# Altium PCB ums.PcbDoc (part 1 of 2)
Units mm, origin at the board's own origin, x right, y up, seen from the top; angles counter-clockwise.
Board outline 30 x 30 mm, 6 copper layers (Top, POWER, INNER_TOP, INNER_BOTTOM, GROUND, Bottom), stack 1.545 mm thick; 182 components, 122 nets, 559 pads, 122 vias.
Unrouted connection lines stored in the file: 144.
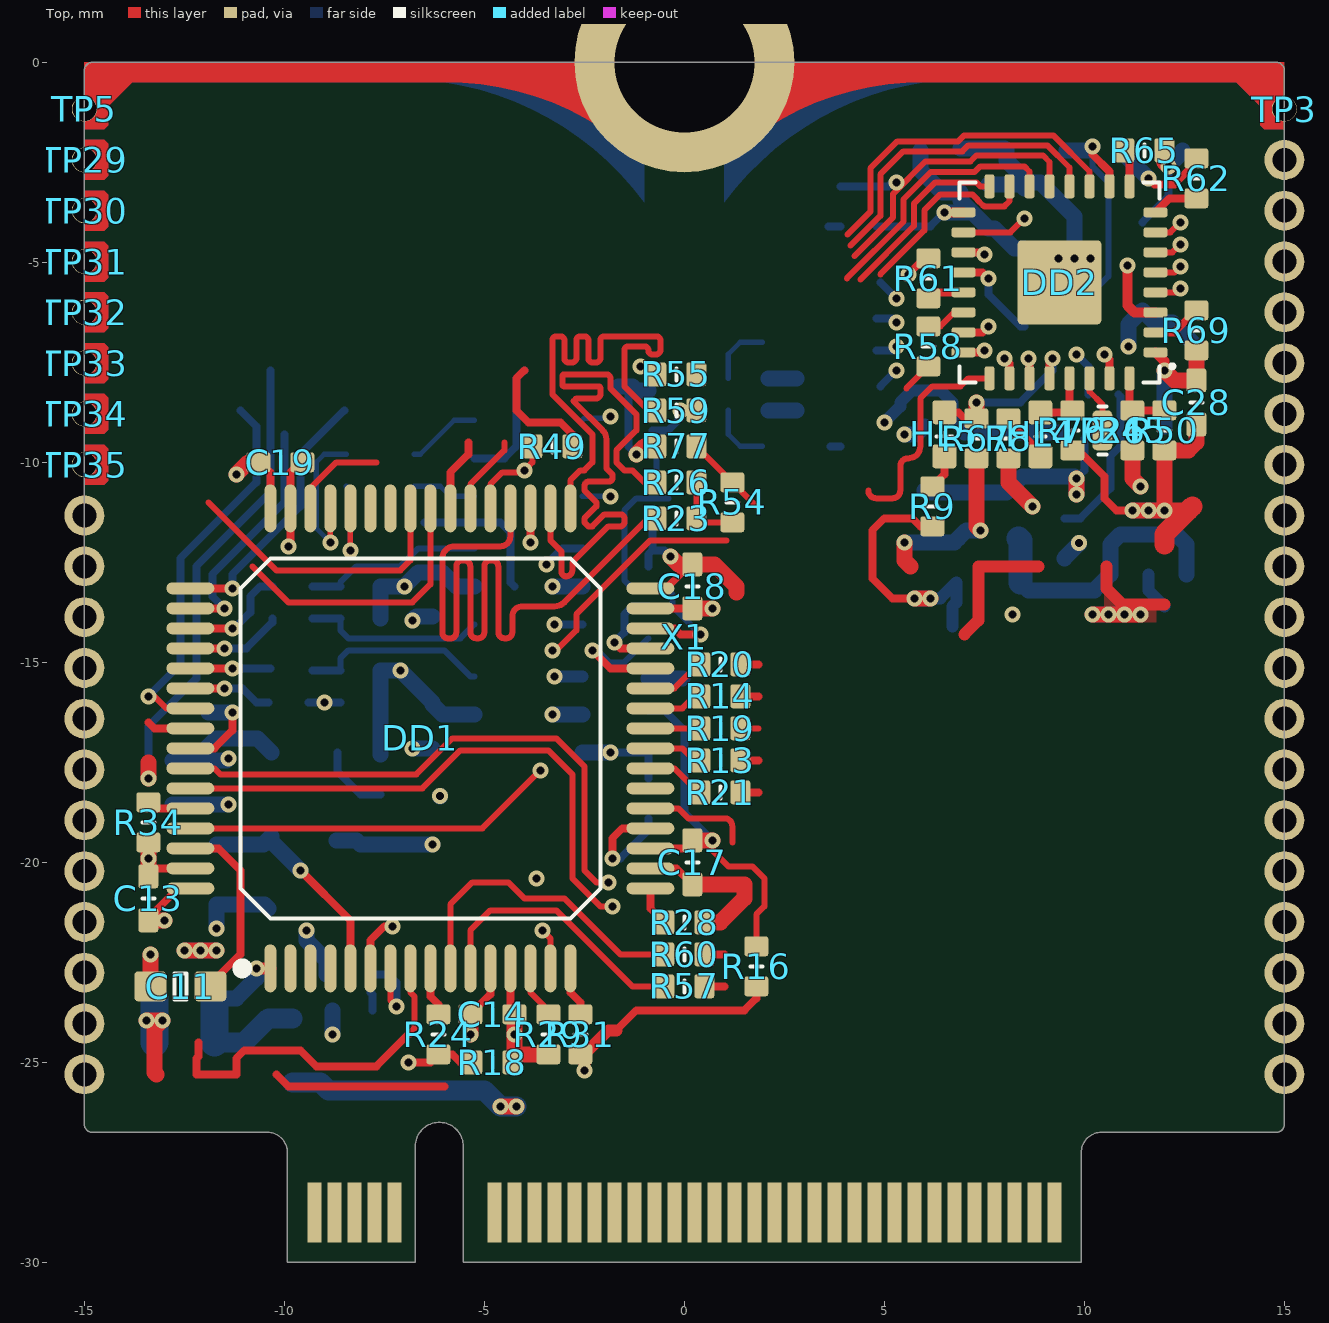
[diagram p0: Top view]
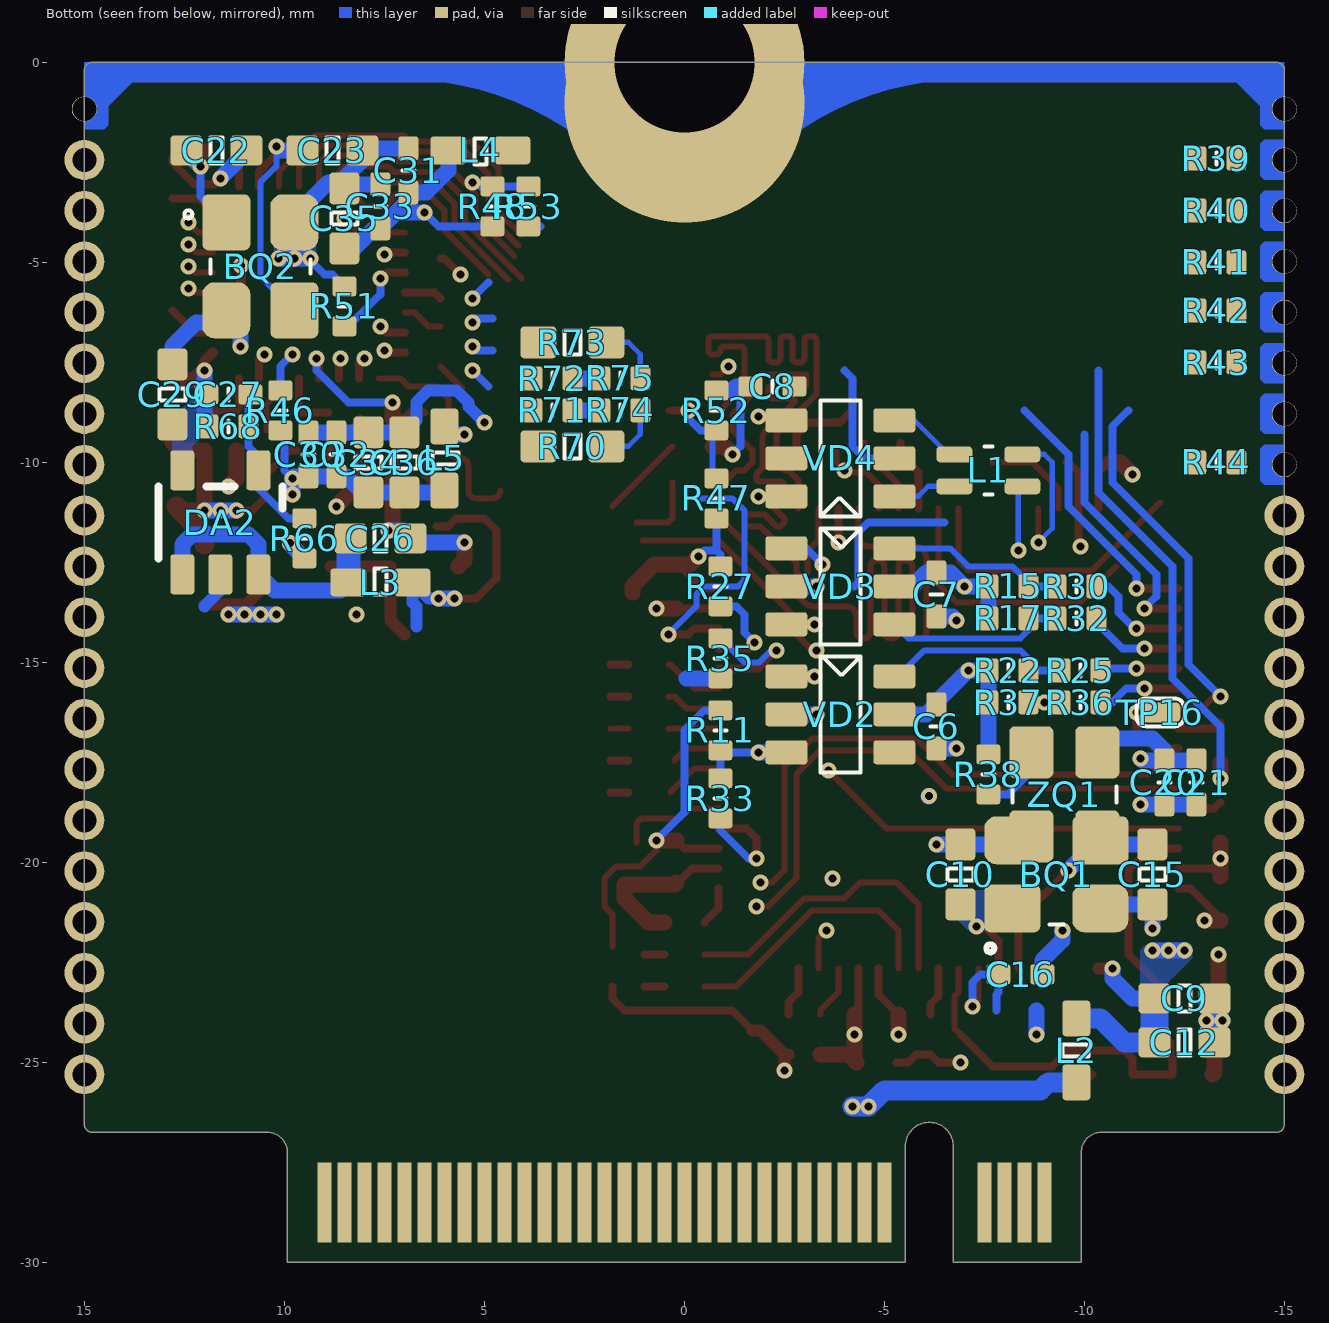
[diagram p1: Bottom view, seen from below]
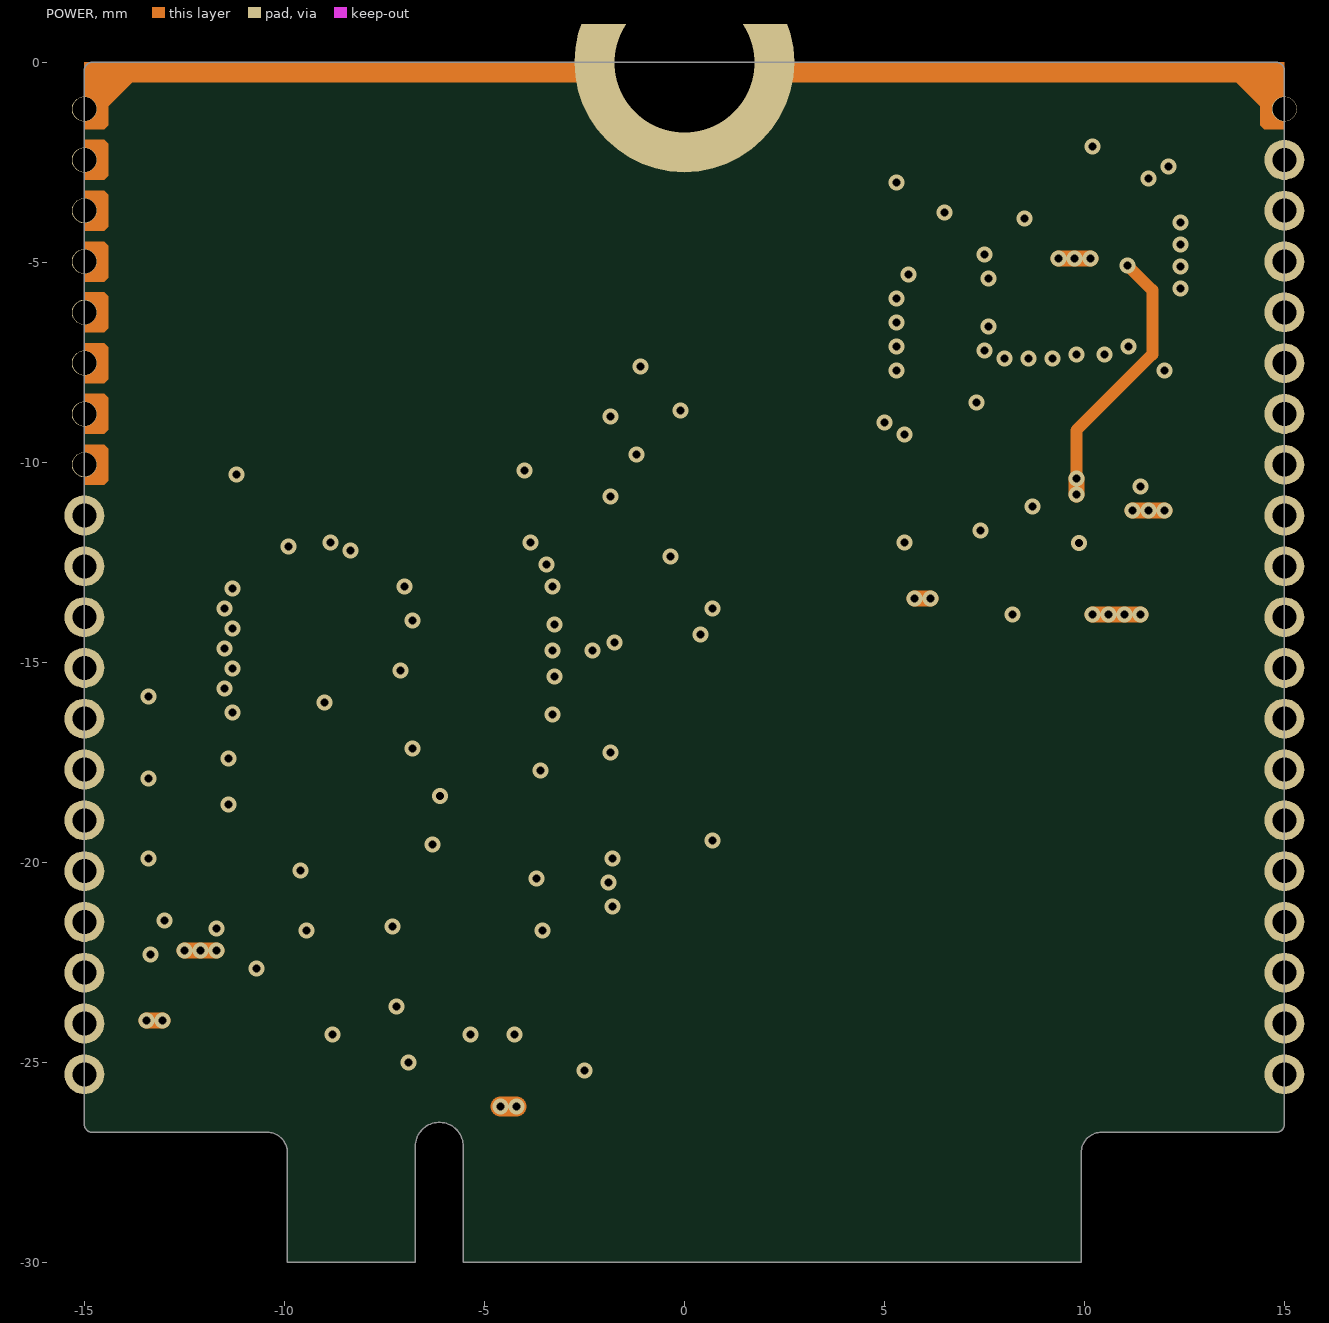
[diagram p2: POWER]
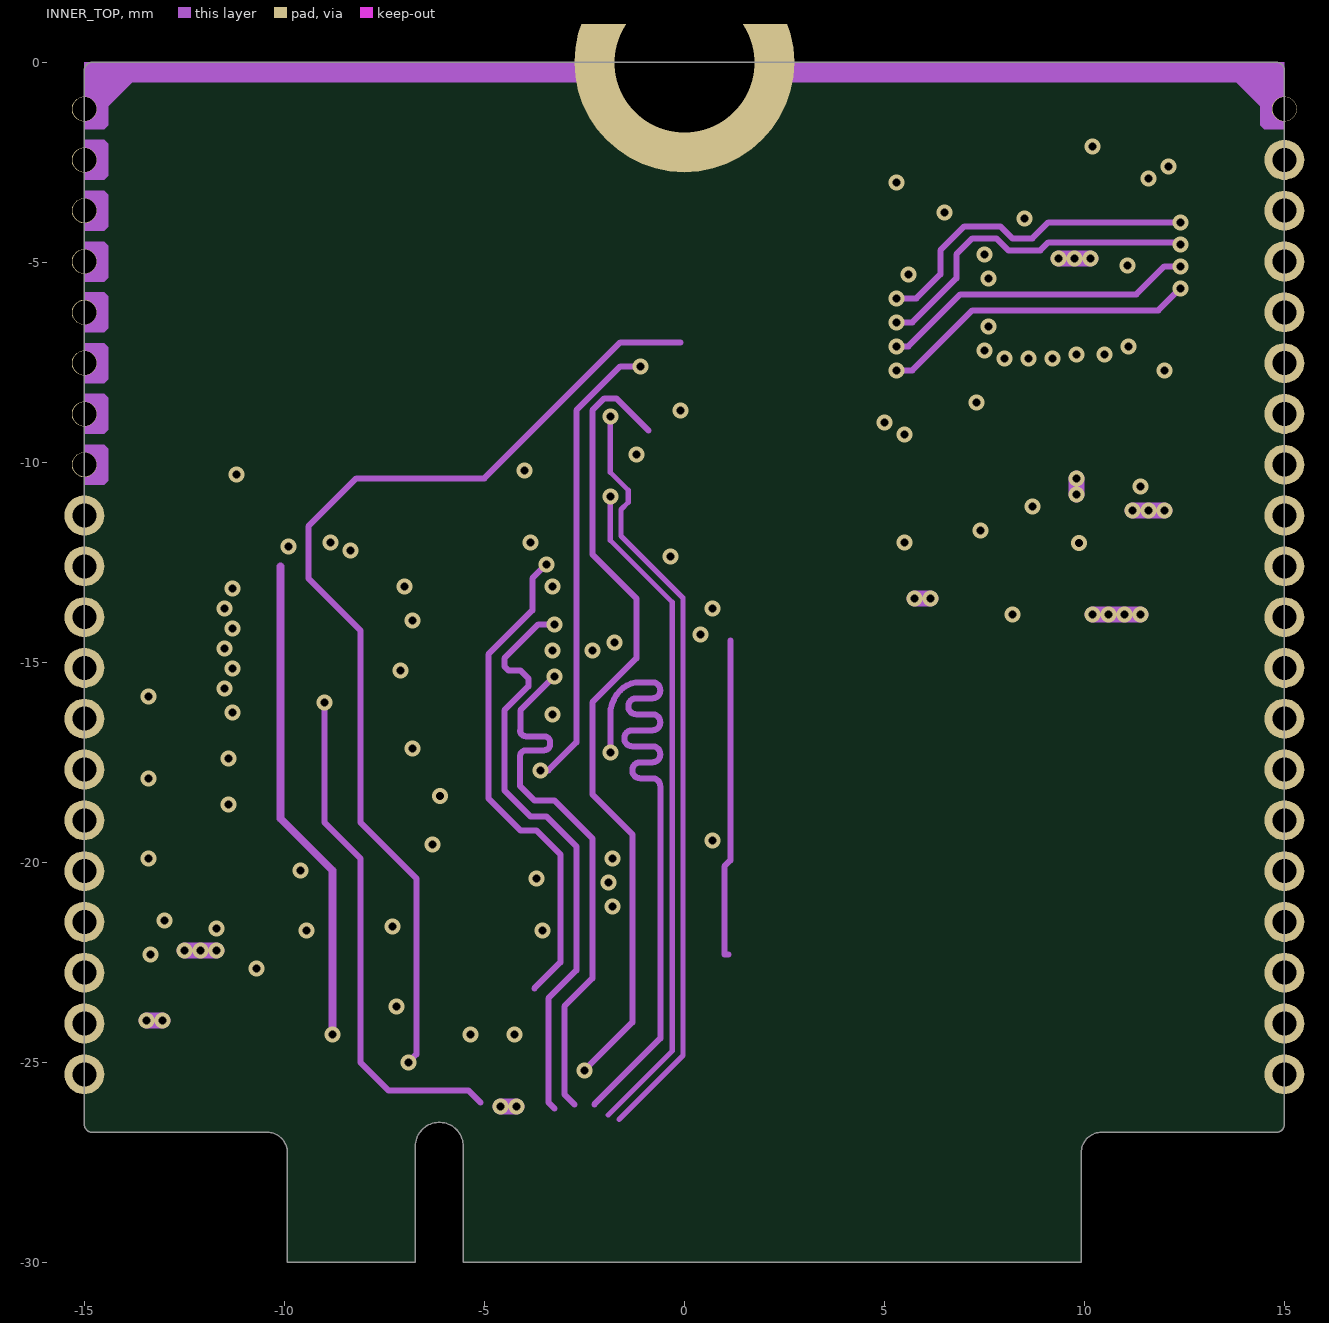
[diagram p3: INNER_TOP]
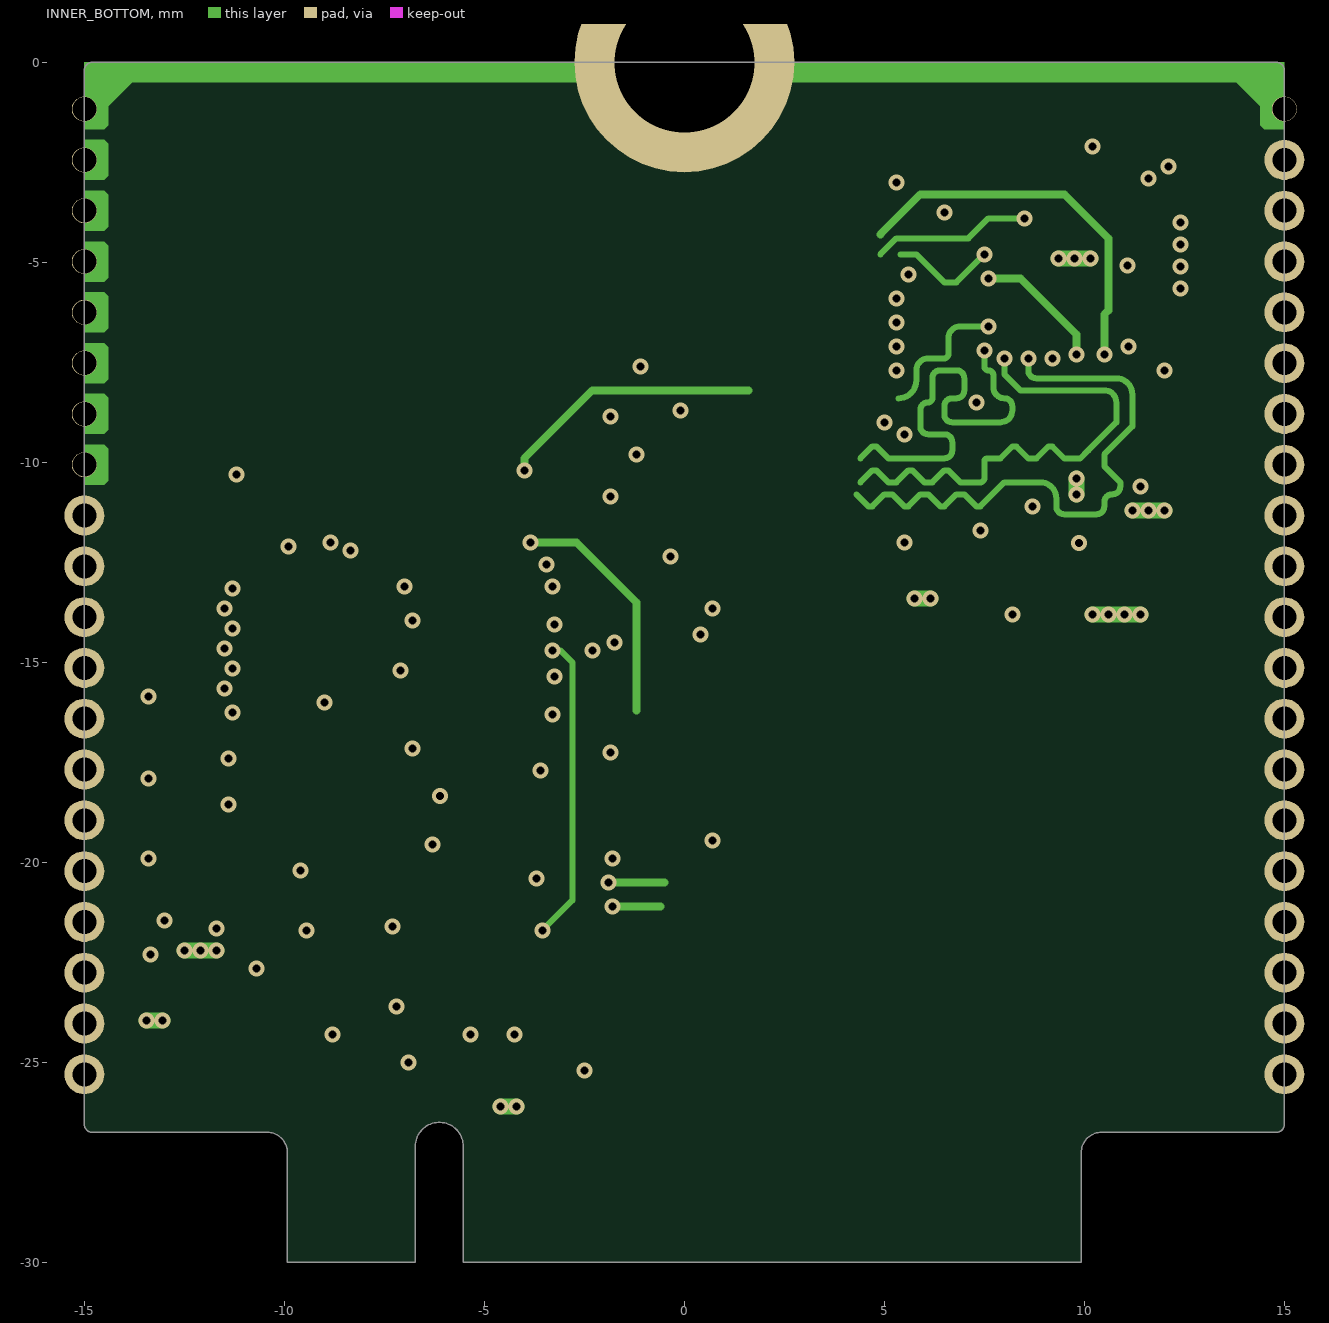
[diagram p4: INNER_BOTTOM]
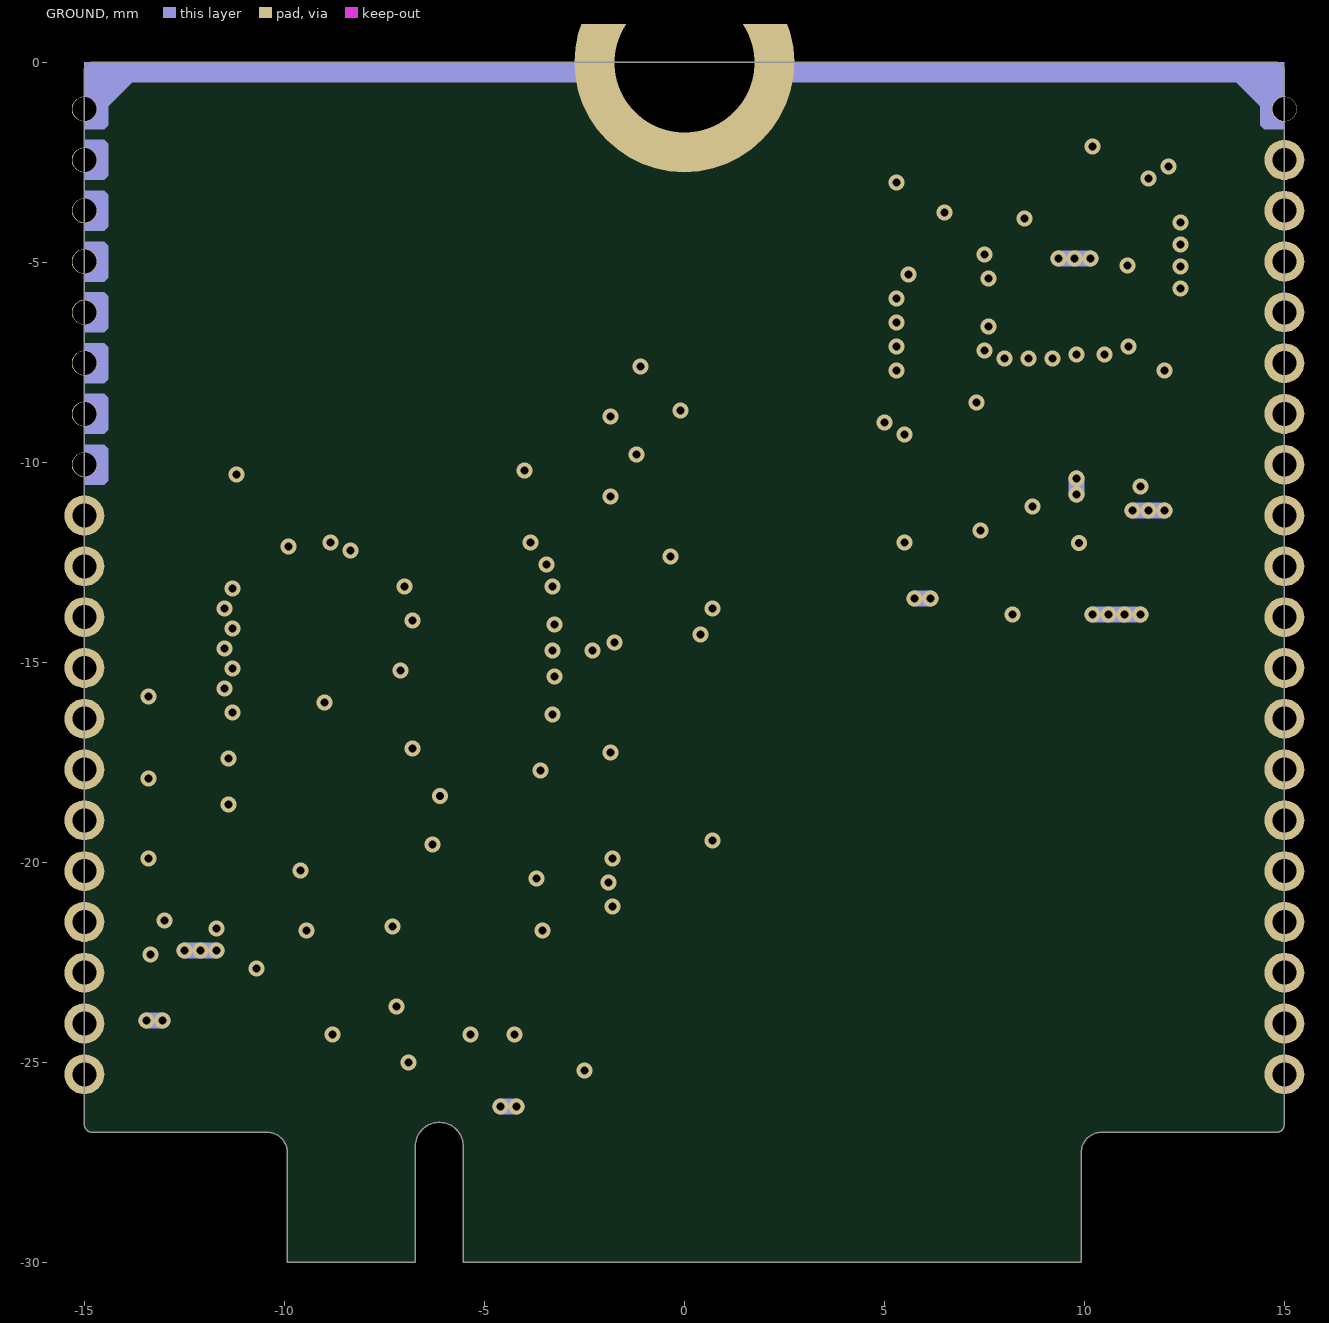
[diagram p5: GROUND]

## Layer stack, top to bottom
Top Solder Mask: solder mask 0.025, Solder Resist, Dk 3.5
Top: signal copper 0.045
PREPREG_TOP: prepreg 0.125, 2116, Dk 5.07
POWER: signal copper 0.015
CORE_TOP: core 0.51, FR-4(TG 170), Dk 4.7
INNER_TOP: signal copper 0.015
PREPREG_INNER: prepreg 0.125, 2116, Dk 5.07
INNER_BOTTOM: signal copper 0.015
CORE_BOTTOM: core 0.51, FR-4(TG 170), Dk 4.7
GROUND: signal copper 0.015
PREPREG_BOTTOM: prepreg 0.125, 2116, Dk 5.07
Bottom: signal copper 0.045
Bottom Solder Mask: solder mask 0.025, Solder Resist, Dk 3.5

## Board outline
-9.925,-30 -9.925,-27.25 ccw(c-10.425,-27.25) -10.425,-26.75 -14.8,-26.75 cw(c-14.8,-26.55) -15,-26.55 -15,-0.2 cw(c-14.8,-0.2) -14.8,0 14.8,0 cw(c14.8,-0.2) 15,-0.2 15,-26.55 cw(c14.8,-26.55) 14.8,-26.75 10.425,-26.75 ccw(c10.425,-27.25) 9.925,-27.25 9.925,-30 -5.525,-30 -5.525,-27.1 ccw(c-6.125,-27.1) -6.725,-27.1 -6.725,-30

## Design rules (kind name [scope] priority, off if disabled: settings)
BoardOutlineClearance BoardOutlineClearanceSilk [OnLayer('Top Overlay') or OnLayer('Bottom Overlay')] p1: gap=0.01 ignorepadtopadclearanceinfootprint=FALSE
BoardOutlineClearance BoardOutlineClearancePolygon [IsPoly] p2: gap=0.5 ignorepadtopadclearanceinfootprint=FALSE
BoardOutlineClearance [All] p3: gap=0.25 ignorepadtopadclearanceinfootprint=FALSE
Clearance Clearance_BOARD [InNetClass('All Nets') vs OnLayer('Board')] p1: gap=0.3 ignorepadtopadclearanceinfootprint=FALSE
Clearance Clearance_KeepOut [InNetClass('All Nets') vs OnLayer('Keep-Out Layer')] p2: gap=0.3 ignorepadtopadclearanceinfootprint=FALSE
Clearance ClearancePolygonsToHighSpeed [InNetClass('MII_RX') or InNetClass('MII_RX_PHY') or InNetClass('MII_TX') or InNetClass('MII_TX_MCU') or InDifferentialPair('PHY_TX_RX') or InDifferentialPair('D') or InDifferentialPair('SPE_DATA') or InDifferentialPair('USB') vs InPolygon] p3: gap=0.45 ignorepadtopadclearanceinfootprint=FALSE
Clearance ClearancePolygons [All vs InPolygon] p4: gap=0.25 ignorepadtopadclearanceinfootprint=FALSE
Clearance [All] p5: gap=0.1 ignorepadtopadclearanceinfootprint=FALSE except(0: Arc-Hole Track-Hole SMDPad-Hole THPad-Hole Via-Hole Fill-Hole Poly-Hole Region-Hole Text-Hole; 0.15: Arc-Poly Track-Poly SMDPad-Poly THPad-Poly Via-Poly Fill-Poly Poly-Poly; 0.2: Poly-Region Poly-Text)
DiffPairsRouting [All] p1: maxlimit=0.12 minlimit=0.12 mostfreqgap=0.12 toplayer_minwidth=0.13 toplayer_maxwidth=0.13 toplayer_prefwidth=0.13 midlayer1_minwidth=0.13 midlayer1_maxwidth=0.381 midlayer1_prefwidth=0.13 midlayer2_minwidth=0.13 midlayer2_maxwidth=0.381 midlayer2_prefwidth=0.13 midlayer3_minwidth=0.13 midlayer3_maxwidth=0.381 midlayer3_prefwidth=0.13 midlayer4_minwidth=0.13 midlayer4_maxwidth=0.381 midlayer4_prefwidth=0.13 bottomlayer_minwidth=0.13 bottomlayer_maxwidth=0.13 bottomlayer_prefwidth=0.13 maxuncoupledlength=5
FanoutControl Fanout_Default [All] p1: bgadir=Out bgaviamode=Centered fanoutstyle=Auto fanoutdirection=Alternating viagrid=0.025 // Fanout_Default (Default Rule)
HoleSize [All] p1: absolutevalues=TRUE maxlimit=5 minlimit=0.025 maxpercent=80.000 minpercent=20.000
HoleToHoleClearance [All] p1: gap=0.3 allowstackedmicrovias=TRUE
MatchedLengths MatchedLengthsMDI [InNetClass('MDI')] p1: tolerance=3 checknetsindiffpair=FALSE checkdiffpairvsdiffpair=TRUE checkxsignals=TRUE checkothers=TRUE
MatchedLengths MatchedLengthsSPI [InNetClass('SPI')] p2: tolerance=3 checknetsindiffpair=FALSE checkdiffpairvsdiffpair=TRUE checkxsignals=TRUE checkothers=TRUE
MatchedLengths MatchLengths_xSignals_MCU_TX [InxSignalClass('xSignals_MCU_TX_MatchLengthsClass')] p3: tolerance=2 checknetsindiffpair=FALSE checkdiffpairvsdiffpair=TRUE checkxsignals=TRUE checkothers=TRUE
MatchedLengths MatchLengths_xSignals_MCU_RX [InxSignalClass('xSignals_MCU_RX_MatchLengthsClass')] p4: tolerance=2 checknetsindiffpair=FALSE checkdiffpairvsdiffpair=TRUE checkxsignals=TRUE checkothers=TRUE
MinimumSolderMaskSliver [All] p1: minsoldermaskwidth=0.099
PasteMaskExpansion [All] p1: expansion=-0.05
PlaneClearance PlaneClearance_3 [InNetClass('LED')] p1: clearance=0.25
PlaneClearance PlaneClearance_2 [InNetClass('24V')] p2: clearance=0.4
PlaneClearance PlaneClearance_1 [InNet('SHIELD')] p3: clearance=0.6
PlaneClearance [All] p4: clearance=0.2
PlaneConnect PlaneConnect_3 [InNetClass('24V')and ispad] p1: planeconnectstyle=Direct reliefexpansion=0.25 reliefentries=4 reliefconductorwidth=0.4 reliefairgap=0.25
PlaneConnect [IsVia] p2: planeconnectstyle=Direct reliefexpansion=0.508 reliefentries=4 reliefconductorwidth=0.254 reliefairgap=0.254
PlaneConnect PlaneConnect_2 [InNet('SHIELD')and IsPad] p3: planeconnectstyle=Direct reliefexpansion=0.25 reliefentries=4 reliefconductorwidth=0.4 reliefairgap=0.25
PlaneConnect PlaneConnect_1 [IsPad] p4: planeconnectstyle=Direct reliefexpansion=0.25 reliefentries=4 reliefconductorwidth=0.3 reliefairgap=0.25
PolygonConnect [All] p1: thpad.connectstyle=Relief thpad.reliefconductorwidth=0.4 thpad.reliefentries=4 thpad.polygonreliefangle="45 Angle" thpad.airgapwidth=0.25 thpad.conductorbypadedge=TRUE thpad.mindistance=0.4 thpad.enablemindistance=FALSE smdpad.connectstyle=Direct smdpad.reliefconductorwidth=0.3 smdpad.reliefentries=4 smdpad.polygonreliefangle="90 Angle" smdpad.airgapwidth=0.25 via.connectstyle=Direct via.reliefconductorwidth=0.3 via.reliefentries=4 via.polygonreliefangle="90 Angle" via.airgapwidth=0.25
RoutingVias [All] p1: holewidth=0.2 width=0.4 viastyle="Through Hole" minholewidth=0.2 minwidth=0.4 maxholewidth=0.3 maxwidth=0.7
SilkToSilkClearance [All] p1: silktosilkclearance=0.05
SilkToSolderMaskClearance SilkToSolderMaskClearanceNarrow [WithinRoom('Room_Silk_Narrow')] p1: minsilkscreentomaskgap=0.075 clearancetoexposedcopper=FALSE
SilkToSolderMaskClearance [not HasFootprint('TEST_POINT_SMD')] p2: minsilkscreentomaskgap=0.1 clearancetoexposedcopper=FALSE
SolderMaskExpansion [All] p1: expansion=0.05 istentingtop=FALSE
SupplyNets "Schematic Supply Nets_12" [InNet('SPE_VDDA')] p1: voltage=0.000
SupplyNets "Schematic Supply Nets_11" [InNet('PHY_RXD0')] p2: voltage=0.000
SupplyNets "Schematic Supply Nets_10" [InNet('PHY_RXD3')] p3: voltage=0.000
SupplyNets "Schematic Supply Nets_9" [InNet('+3V3')] p4: voltage=0.000
SupplyNets "Schematic Supply Nets_8" [InNet('PHY_ADR1')] p5: voltage=0.000
SupplyNets "Schematic Supply Nets_6" [InNet('GPIO1')] p6: voltage=0.000
SupplyNets "Schematic Supply Nets_5" [InNet('PHY_RXD1')] p7: voltage=0.000
SupplyNets "Schematic Supply Nets_4" [InNet('GND')] p8: voltage=0.000
SupplyNets "Schematic Supply Nets_3" [InNet('SPE_VDDIO')] p9: voltage=0.000
SupplyNets "Schematic Supply Nets_1" [InNet('+3V3MCU')] p10: voltage=0.000
SupplyNets "Schematic Supply Nets" [InNet('LED_G')] p11: voltage=0.000
UnRoutedNet [All] p1: checkbadconnections=TRUE
ViasUnderSMD ViasUnderSMD_GND [InNet('GND')] p1: allowed=TRUE
ViasUnderSMD [All] p2: allowed=TRUE
Width 50Ohm [InNetClass('S50Ohm')] p1: maxlimit=0.16 minlimit=0.14 preferedwidth=0.16 toplayer_minwidth=0.16 midlayer1_maxwidth=0.14 midlayer1_prefwidth=0.14 midlayer2_maxwidth=0.14 midlayer2_prefwidth=0.14 bottomlayer_minwidth=0.16 impedanceprofiledriven=TRUE impedanceprofileid={9A124F16-33E1-49E2-B7BF-F00B3E11272E} impedanceprofilevalue=50.000000 minimp=50.000000 maximp=50.000000 favimp=50.000000
Width [All] p2: maxlimit=100 minlimit=0.1 preferedwidth=0.2
15 further rules are at their usual default settings.

## Classes and differential pairs
net class SPI: CLK MISO MOSI ~CS
net class MDI: MDC MDIO
net class MII_TX_MCU: MCURXD0 MCURXD1 MCURXD2 MCURXD3 MCURXDV
net class MII_RX_PHY: PHY_RXC PHY_RXD0 PHY_RXD1 PHY_RXD2 PHY_RXD3 PHY_RXDV
component class MCU: BQ1 C5 C6 C7 C8 C9 C10 C11 C12 C13 C14 C15 C16 C17 C18 C19 C20 C21 DD1 L1 L2 R10 R11 R12 R13 R14 R15 R16 R17 R18 R19 R20 R21 R22 R23 R24 R25 R26 R27 R28 R29 R30 R31 R32 R33 R34 R35 R36 R37 R38 R39 R40 R41 R42 R43 R44 TP14 TP15 TP16 TP17 TP18 TP19 TP20 TP21 TP22 TP23 TP24 TP29 TP30 TP31 TP32 TP33 TP34 TP35 VD2 VD3 VD4 ZQ1
component class Struct: C1 C2 C3 C4 DA1 HL1 HL2 HL3 HL4 HL5 R1 R2 R3 R4 R5 R6 R7 R8 R9 TP1 TP2 TP3 TP4 TP5 TP6 TP7 TP8 TP9 TP10 TP11 TP12 TP13 VD1 X1
component class RS-485: C37 C38 DD3 L6 L7 R78 R79 R80 R81 VD7
component class T1L: BQ2 C22 C23 C24 C25 C26 C27 C28 C29 C30 C31 C32 C33 C34 C35 C36 DA2 DD2 L3 L4 L5 R45 R46 R47 R48 R49 R50 R51 R52 R53 R54 R55 R56 R57 R58 R59 R60 R61 R62 R63 R64 R65 R66 R67 R68 R69 R70 R71 R72 R73 R74 R75 R76 R77 TP25 TP26 TP27 TP28 VD5 VD6
net class S50Ohm: MCURXD0 MCURXD1 MCURXD2 MCURXD3 MCURXDV PHY_RXC PHY_RXD0 PHY_RXD1 PHY_RXD2 PHY_RXD3 PHY_RXDV PHY_RXN PHY_RXP PHY_TXC PHY_TXN PHY_TXP RXC RXD0 RXD1 RXD2 RXD3 RXDV TXC TXD0 TXD1 TXD2 TXD3 TXEN TXEN_R/VCAP1_H563
net class MII_TX: RXC RXD0 RXD1 RXD2 RXD3 RXDV
net class MII_RX: TXC TXD0 TXD1_H563 TXD1_R TXD2 TXD3 TXEN_H563 TXEN_R/VCAP1_H563
differential pair SPE_DATA_C: +SPE_DATA_C_P -SPE_DATA_C_N
differential pair D: +D_P -D_N
differential pair USB: +USB_P -USB_N
differential pair SPE_DATA: +SPE_DATA_P -SPE_DATA_N

## Components (designator, comment, footprint, x,y, rotation, side; value= is the part's Value field where it differs from the comment)
BQ1 "8 MHz" DSX321G_UNDER12MHZ -9.3,-20.3 r180 bottom
BQ2 "25 MHz" DSX321G_UNDER12MHZ 10.6,-5.1 r270 bottom
C1 "4.7u" C0603 56.4,21.2 r180 top value="4,7 мкФ 10% 16 В X5R"
C2 "100n" C0402 58.9,21.1 r180 top value="100 нФ 10% 50 В X7R"
C3 "100n" C0402 58.3,19 r0 top value="100 нФ 10% 50 В X7R"
C4 "4.7u" C0603 62.5,28.7 r90 top value="4,7 мкФ 10% 16 В X5R"
C5 "4.7u" C0603 -5.8,4 r90 bottom value="4,7 мкФ 10% 16 В X5R"
C6 "100n" C0402 -6.3,-16.6 r90 bottom value="100 нФ 10% 50 В X7R"
C7 "100n" C0402 -6.3,-13.3 r90 bottom value="100 нФ 10% 50 В X7R"
C8 "100n" C0402 -2.2,-8.1 r180 bottom value="100 нФ 10% 50 В X7R"
C9 "4.7u" C0603 -12.5,-23.4 r180 bottom value="4,7 мкФ 10% 16 В X5R"
C10 "12p" C0603 -6.9,-20.3 r270 bottom value="12 пФ 5% 50 В C0G(NP0)"
C11 "4.7u" C0603 -12.6,-23.1 r180 top value="4,7 мкФ 10% 16 В X5R"
C12 "4.7u" C0603 -12.5,-24.5 r180 bottom value="4,7 мкФ 10% 16 В X5R"
C13 "100n" C0402 -13.4,-20.9 r270 top value="100 нФ 10% 50 В X7R"
C14 "100n" C0402 -4.8,-23.8 r0 top value="100 нФ 10% 50 В X7R"
C15 "12p" C0603 -11.7,-20.3 r270 bottom value="12 пФ 5% 50 В C0G(NP0)"
C16 "100n" C0402 -8.4,-22.8 r0 bottom value="100 нФ 10% 50 В X7R"
C17 "100n" C0402 0.2,-20 r90 top value="100 нФ 10% 50 В X7R"
C18 "100n" C0402 0.2,-13.1 r90 top value="100 нФ 10% 50 В X7R"
C19 "100n" C0402 -10.1,-10 r180 top value="100 нФ 10% 50 В X7R"
C20 "100n" C0402 -12,-18 r90 bottom value="100 нФ 10% 50 В X7R"
C21 "10n" C0402 -12.8,-18 r90 bottom value="10 нФ 10% 50 В X7R"
C22 "12p" C0603 11.7,-2.2 r180 bottom value="12 пФ 5% 50 В C0G(NP0)"
C23 "12p" C0603 8.8,-2.2 r180 bottom value="12 пФ 5% 50 В C0G(NP0)"
C24 "220n" C0805_ROUNDED 10.6,5.1 r180 bottom value="0,22 мкФ ±10% 100 В X7R"
C25 "220n" C0805_ROUNDED 10.6,6.7 r180 bottom value="0,22 мкФ ±10% 100 В X7R"
C26 "4.7u" C0603 7.6,-11.9 r180 bottom value="4,7 мкФ 10% 16 В X5R"
C27 "100n" C0402 11.4,-8.3 r180 bottom value="100 нФ 10% 50 В X7R"
C28 "10n" C0402 12.8,-8.5 r90 top value="10 нФ 10% 50 В X7R"
C29 "4.7u" C0603 12.8,-8.3 r90 bottom value="4,7 мкФ 10% 16 В X5R"
C30 "10n" C0402 9.4,-9.8 r270 bottom value="10 нФ 10% 50 В X7R"
C31 "10n" C0402 6.9,-2.7 r270 bottom value="10 нФ 10% 50 В X7R"
C32 "100n" C0402 8.7,-9.8 r270 bottom value="100 нФ 10% 50 В X7R"
C33 "100n" C0402 7.6,-3.6 r270 bottom value="100 нФ 10% 50 В X7R"
C34 "4.7u" C0603 7.9,-10 r90 bottom value="4,7 мкФ 10% 16 В X5R"
C35 "4.7u" C0603 8.5,-3.9 r90 bottom value="4,7 мкФ 10% 16 В X5R"
C36 "4.7u" C0603 7,-10 r90 bottom value="4,7 мкФ 10% 16 В X5R"
C37 "100n" C0402 42.9,8.6 r270 bottom value="100 нФ 10% 50 В X7R"
C38 "100n" C0402 39,12.45 r270 bottom value="100 нФ 10% 50 В X7R"
DA1 "LM317G" SOT-223 59.5,24.9 r270 top
DA2 "TPL730ADJ-5TR" SOT-23(DBV5) 11.6,-11.5 r180 bottom
DD1 "STM32F107RCT6" LQFP-64-STM-MICROCONTROLLER -6.6,-16.9 r90 top
DD2 "DP83TD510E" QFN-32_EPAD_2.1X2.1 9.38,-5.5 r180 top
DD3 "SP3485EEN" SOP-8 44.16,13.7 r0 bottom
HL1 "FYLS-0402UBC" LED_SMD_0402_BLUE -16.2,2.6 r270 top
HL2 "FYLS-0402UBC" LED_SMD_0402_BLUE -15.2,2.6 r270 top
HL3 "FYLS-0402UGC" LED_SMD_0402 63,21.9 r270 top
HL4 "FYLS-0402UGC" LED_SMD_0402 8.9,-9.3 r90 top
HL5 "FYLS-0402CKUAC (оранжевый)" LED_SMD_0402_ORANGE 6.5,-9.3 r90 top
L1 "DLW21SN900SQ2L" DLW21S -7.6,-10.2 r180 bottom
L2 "120 Ohm" BLM18PG -9.8,-24.7 r270 bottom value="120 Ом @ 100 МГц 2 А"
L3 "120 Ohm" BLM18PG 7.6,-13 r0 bottom value="120 Ом @ 100 МГц 2 А"
L4 "120 Ohm" BLM18PG 5.1,-2.2 r180 bottom value="120 Ом @ 100 МГц 2 А"
L5 "120 Ohm" BLM18PG 6,-9.9 r90 bottom value="120 Ом @ 100 МГц 2 А"
L6 "120 Ohm" BLM18PG 40.2,6.1 r270 bottom value="120 Ом @ 100 МГц 2 А"
L7 "120 Ohm" BLM18PG 41.3,6.1 r270 bottom value="120 Ом @ 100 МГц 2 А"
R1 "10K" R0402 60.3,18.2 r0 top value="10 кОм 1%"
R2 "10K" R0402 58.3,18.2 r0 top value="10 кОм 1%"
R3 "16K5" R0603 60.2,28.9 r0 top value="16,5 кОм 1%"
R4 "15K" R0603 57,28.9 r0 top value="15 кОм 1%"
R5 "1K" R0402 62,22 r270 top value="1 кОм 1%"
R6 "1K" R0402 -16.2,2.6 r270 bottom value="1 кОм 1%"
R7 "1K" R0402 -15.2,2.6 r270 bottom value="1 кОм 1%"
R8 "1K" R0402 8.1,-9.4 r270 top value="1 кОм 1%"
R9 "1K" R0402 6.2,-11.1 r270 top value="1 кОм 1%"
R10 "0" R0402 -4.2,4.4 r270 bottom value="0 ом 1%"
R11 "4K7" R0402 -0.9,-16.7 r90 bottom value="4,7 кОм 1%"
R12 "0" R0402 -4.8,5.7 r180 bottom value="0 ом 1%"
R13 "22" R0402 0.9,-17.45 r0 top value="22 Ом 1%"
R14 "22" R0402 0.9,-15.85 r0 top value="22 Ом 1%"
R15 "4K7" R0402 -8.1,-13.1 r0 bottom value="4,7 кОм 1%"
R16 "4K7" R0402 1.8,-22.6 r90 top value="4,7 кОм 1%"
R17 "4K7" R0402 -8.1,-13.9 r0 bottom value="4,7 кОм 1%"
R18 "4K7" R0402 -4.8,-25 r0 top value="4,7 кОм 1%"
R19 "22" R0402 0.9,-16.65 r0 top value="22 Ом 1%"
R20 "22" R0402 0.9,-15.05 r0 top value="22 Ом 1%"
R21 "22" R0402 0.9,-18.25 r0 top value="22 Ом 1%"
R22 "4K7" R0402 -8.1,-15.2 r0 bottom value="4,7 кОм 1%"
R23 "0" R0402 -0.2,-11.4 r180 top value="0 ом 1%"
R24 "22" R0402 -6.15,-24.3 r270 top value="22 Ом 1%"
R25 "22" R0402 -9.9,-15.2 r0 bottom value="22 Ом 1%"
R26 "0" R0402 -0.2,-10.5 r180 top value="0 ом 1%"
R27 "4K7" R0402 -0.9,-13.1 r90 bottom value="4,7 кОм 1%"
R28 "4K7" R0402 0,-21.5 r0 top value="4,7 кОм 1%"
R29 "4K7" R0402 -3.4,-24.3 r270 top value="4,7 кОм 1%"
R30 "22" R0402 -9.8,-13.1 r0 bottom value="22 Ом 1%"
R31 "22" R0402 -2.6,-24.3 r270 top value="22 Ом 1%"
R32 "22" R0402 -9.8,-13.9 r0 bottom value="22 Ом 1%"
R33 "22" R0402 -0.9,-18.4 r90 bottom value="22 Ом 1%"
R34 "22" R0402 -13.4,-19 r90 top value="22 Ом 1%"
R35 "22" R0402 -0.9,-14.9 r90 bottom value="22 Ом 1%"
R36 "22" R0402 -9.9,-16 r180 bottom value="22 Ом 1%"
R37 "4K7" R0402 -8.1,-16 r0 bottom value="4,7 кОм 1%"
R38 "4K7" R0402 -7.6,-17.8 r270 bottom value="4,7 кОм 1%"
R39 "22" R0402 -13.3,-2.4 r0 bottom value="22 Ом 1%"
R40 "22" R0402 -13.3,-3.7 r0 bottom value="22 Ом 1%"
R41 "22" R0402 -13.3,-5 r0 bottom value="22 Ом 1%"
R42 "22" R0402 -13.3,-6.2 r0 bottom value="22 Ом 1%"
R43 "22" R0402 -13.3,-7.5 r0 bottom value="22 Ом 1%"
R44 "22" R0402 -13.3,-10 r0 bottom value="22 Ом 1%"
R45 "2K49" R0402 11.2,-9.2 r90 top value="2,49 кОм 1%"
R46 "2K49" R0402 10.1,-8.7 r90 bottom value="2,49 кОм 1%"
R47 "2K49" R0402 -0.8,-10.9 r90 bottom value="2,49 кОм 1%"
R48 "2K49" R0402 4.8,-3.6 r90 bottom value="2,49 кОм 1%"
R49 "10K" R0402 -3.3,-9.6 r180 top value="10 кОм 1%"
R50 "2K49" R0402 12,-9.2 r270 top value="2,49 кОм 1%"
R51 "2K49" R0402 8.5,-6.1 r90 bottom value="2,49 кОм 1%"
R52 "2K49" R0402 -0.8,-8.7 r90 bottom value="2,49 кОм 1%"
R53 "2K49" R0402 3.9,-3.6 r270 bottom value="2,49 кОм 1%"
R54 "22" R0402 1.2,-11 r90 top value="22 Ом 1%"
R55 "22" R0402 -0.2,-7.8 r0 top value="22 Ом 1%"
R56 "22" R0402 -3.4,5.3 r90 bottom value="22 Ом 1%"
R57 "22" R0402 0,-23.1 r0 top value="22 Ом 1%"
R58 "22" R0402 6.1,-7.1 r90 top value="22 Ом 1%"
R59 "22" R0402 -0.2,-8.7 r0 top value="22 Ом 1%"
R60 "22" R0402 0,-22.3 r0 top value="22 Ом 1%"
R61 "10K" R0402 6.1,-5.4 r270 top value="10 кОм 1%"
R62 "2K49" R0402 12.8,-2.9 r270 top value="2,49 кОм 1%"
R63 "1M" R0603 10.7,3.8 r180 bottom value="1 МОм 1%"
R64 "1M" R0603 10.7,8 r180 bottom value="1 МОм 1%"
R65 "0" R0402 11.5,-2.2 r180 top value="0 ом 1%"
R66 "10K" R0402 9.5,-11.9 r90 bottom value="10 кОм 1%"
R67 "2K49" R0402 7.3,-9.4 r270 top value="2,49 кОм 1%"
R68 "2K49" R0402 11.4,-9.1 r180 bottom value="2,49 кОм 1%"
R69 "0" R0402 12.8,-6.7 r270 top value="0 ом 1%"
R70 "39" R0603 2.8,-9.6 r180 bottom value="39 Ом 1%"
R71 "1K" R0402 3.3,-8.7 r180 bottom value="1 кОм 1%"
R72 "1K" R0402 3.3,-7.9 r180 bottom value="1 кОм 1%"
R73 "39" R0603 2.8,-7 r180 bottom value="39 Ом 1%"
R74 "1K" R0402 1.6,-8.7 r180 bottom value="1 кОм 1%"
R75 "1K" R0402 1.6,-7.9 r180 bottom value="1 кОм 1%"
R76 "2K49" R0402 9.7,-9.2 r270 top value="2,49 кОм 1%"
R77 "2K49" R0402 -0.2,-9.6 r180 top value="2,49 кОм 1%"
R78 "4K7" R0402 42.7,14.4 r180 bottom value="4,7 кОм 1%"
R79 "1K" R0402 42.4,6.1 r270 bottom value="1 кОм 1%"
R80 "1K" R0402 39.1,6.1 r270 bottom value="1 кОм 1%"
R81 "120R" R0805_ROUNDED 40.9,6.3 r180 top value="120 Ом 1%"
TP1 "TEST_POINT_SMD" TEST_POINT_SMD 31,-26.4 r180 top
TP2 "TEST_POINT_SMD" TEST_POINT_SMD 31.8,-22 r180 top
TP3 "TEST_POINT_1.27_STEP" TEST_POINT_1.27_STEP#1 15,-0.997 r0 top
TP4 "TEST_POINT_SMD" TEST_POINT_SMD 26.05,-23.8 r180 top
TP5 "TEST_POINT_1.27_STEP" TEST_POINT_1.27_STEP#2 -15,-1.17 r0 top
TP6 "TEST_POINT_SMD" TEST_POINT_SMD 26.55,-25.2 r180 top
TP7 "TEST_POINT_SMD" TEST_POINT_SMD 46.9,-4.5 r90 top
TP8 "TEST_POINT_SMD" TEST_POINT_SMD 25.55,-25.2 r180 top
TP9 "TEST_POINT_SMD" TEST_POINT_SMD 27.05,-23.8 r180 top
TP10 "TEST_POINT_SMD" TEST_POINT_SMD 25.05,-23.8 r180 top
TP11 "TEST_POINT_SMD" TEST_POINT_SMD 22.3,-12.1 r90 top
TP12 "TEST_POINT_SMD" TEST_POINT_SMD 22.9,-16.4 r180 top
TP13 "TEST_POINT_SMD" TEST_POINT_SMD 29.3,-15.1 r180 top
TP14 "TEST_POINT_SMD" TEST_POINT_SMD -56.8,32.8 r180 top
TP15 "TEST_POINT_SMD" TEST_POINT_SMD 24.5,-3 r270 top
TP16 "TEST_POINT_SMD" TEST_POINT_SMD -11.9,-16.25 r90 bottom
TP17 "TEST_POINT_SMD" TEST_POINT_SMD -56,31 r90 bottom
TP18 "TEST_POINT_SMD" TEST_POINT_SMD -58,36 r90 bottom
TP19 "TEST_POINT_SMD" TEST_POINT_SMD -54.4,36.9 r180 bottom
TP20 "TEST_POINT_SMD" TEST_POINT_SMD -56,36.5 r270 top
TP21 "TEST_POINT_SMD" TEST_POINT_SMD -54.5,34.9 r180 top
TP22 "TEST_POINT_SMD" TEST_POINT_SMD -56.7,34.6 r270 top
TP23 "TEST_POINT_SMD" TEST_POINT_SMD -11.5,4.6 r180 top
TP24 "TEST_POINT_SMD" TEST_POINT_SMD -9.8,4.2 r180 top
TP25 "TEST_POINT_SMD" TEST_POINT_SMD 23,-7 r180 bottom
TP26 "TEST_POINT_SMD" TEST_POINT_SMD 10.45,-9.2 r180 top
TP27 "TEST_POINT_SMD" TEST_POINT_SMD -55.4,40.8 r90 bottom
TP28 "TEST_POINT_SMD" TEST_POINT_SMD 18.8,-3 r180 bottom
TP29 "TEST_POINT_1.27_STEP" TEST_POINT_1.27_STEP#3 -15,-2.4 r0 top
TP30 "TEST_POINT_1.27_STEP" TEST_POINT_1.27_STEP#4 -15,-3.7 r0 top
TP31 "TEST_POINT_1.27_STEP" TEST_POINT_1.27_STEP#5 -15,-5.1 r0 top
TP32 "TEST_POINT_1.27_STEP" TEST_POINT_1.27_STEP#6 -15,-6.4 r0 top
TP33 "TEST_POINT_1.27_STEP" TEST_POINT_1.27_STEP#7 -15,-7.6 r0 top
TP34 "TEST_POINT_1.27_STEP" TEST_POINT_1.27_STEP#8 -15,-8.7 r0 top
TP35 "TEST_POINT_1.27_STEP" TEST_POINT_1.27_STEP#9 -15,-10 r0 top
VD1 "PMEG10020ELRX" SOD123W 50.4,23 r180 bottom
VD2 "USBLC6-2SC6" SOT-23-6-USBLC-INTERNAL-JUMPERS -3.9,-16.3 r180 bottom
VD3 "USBLC6-2SC6" SOT-23-6-USBLC-INTERNAL-JUMPERS -3.9,-13.1 r180 bottom
VD4 "USBLC6-2SC6" SOT-23-6-USBLC-INTERNAL-JUMPERS -3.9,-9.9 r0 bottom
VD5 "SP4020-01FTG-C" SOD-323_BI 17.9,3.9 r90 bottom
VD6 "SP4020-01FTG-C" SOD-323_BI 20.6,8.2 r180 bottom
VD7 "USBLC6-2SC6" SOT-23-6-USBLC-INTERNAL-JUMPERS 40.2,9.1 r180 bottom
X1 "M2_3030_M_Partial" M2-3030-M 0,-15 r0 top locked
ZQ1 "ASE-8.000MHZ-LC-T" ASE-X.XXXMHZ -9.5,-18.3 r270 bottom

## Footprints (in the part's own frame and the unit in brackets; to place one, negate y for a bottom-side part, rotate by r counter-clockwise, add the part's x,y. Pads: shape width x height; smd on the part's side, far side on the other; paste and mask are expansions set on the pad)
ASE-X.XXXMHZ [mm] "Кварцевый генератор"
  rrect25% 1.3x1.1 smd paste-0.05 mask+0.05: 1(-1.05,-0.825) 2(1.05,-0.825) 3(1.05,0.825) 4(-1.05,0.825)
  silkscreen extent -0.2,-1.3 0.2,1.3, body extent -1.7,-1.35 1.7,1.35, height 1.2
BLM18PG [mm]
  rrect25% 0.9x0.7 smd paste-0.02 mask+0.05: 1(-0.8,0) 2(0.8,0)
  silkscreen extent -0.15,-0.35 0.15,0.3, body extent -0.8,-0.4 0.8,0.41, height 0.8
C0402 [mm]
  rrect25% 0.6x0.5 smd paste-0.014 mask+0.05: 1(-0.55,0) 2(0.55,0)
  silkscreen extent 0,-0.15 0,0.15, body extent -0.5,-0.25 0.5,0.25, height 0.63
C0603 [mm]
  rrect25% 0.8x0.75 smd paste-0.02 mask+0.05: 1(-0.75,0) 2(0.75,0)
  silkscreen extent -0.15,-0.33 0.15,0.33, body extent -0.8,-0.4 0.8,0.4, height 0.93
C0805_ROUNDED [mm]
  rrect25% 1x1.25 smd paste-0.029 mask+0.075: 1(-1,0) 2(1,0)
  silkscreen extent -0.2,-0.6 0.2,0.6, body extent -1,-0.62 1,0.63, height 1.02
DLW21S [mm] "Common Mode Noise Filter Murata"
  rrect50% 0.9x0.4 smd paste-0.014 mask+0.075: 1(-0.85,-0.4) 2(0.85,-0.4) 3(0.85,0.4) 4(-0.85,0.4)
  silkscreen extent -0.1,-0.6 0.1,0.6, body extent -1,-0.6 1,0.6, height 1.22
DSX321G_UNDER12MHZ [mm] "Crystal Oscillator 3225"
  rrect25% 1.4x1.2 smd paste-0.033 mask+0.075: 1(-1.1,-0.85) 3(1.1,0.85)
  rrect50% 1.4x1.2 smd paste-0.033 mask+0.075: 2(1.1,-0.85) 4(-1.1,0.85)
  silkscreen extent -1.75,-1.95 0.18,-1.25, body extent -1.6,-1.25 1.6,1.25, height 0.63
LED_SMD_0402 [mm] "1.0*0.5*0.35"
  rrect25% 0.6x0.6 smd paste-0.015 mask+0.05: 1(-0.55,0) 2(0.55,0)
  silkscreen extent -0.05,-0.13 0.05,0.13, body extent -0.5,-0.3 0.5,0.3, height 0.22
LED_SMD_0402_BLUE [mm] "1.0*0.5*0.35"
  rrect25% 0.6x0.6 smd paste-0.015 mask+0.05: 1(-0.55,0) 2(0.55,0)
  silkscreen extent -0.05,-0.2 0.05,0.2, body extent -0.5,-0.3 0.5,0.3, height 0.22
LED_SMD_0402_ORANGE [mm] "1.0*0.5*0.35"
  rrect25% 0.6x0.6 smd paste-0.015 mask+0.05: 1(-0.55,0) 2(0.55,0)
  silkscreen extent -0.05,-0.2 0.05,0.2, body extent -0.5,-0.3 0.5,0.3, height 0.22
LQFP-64-STM-MICROCONTROLLER [mm] "LQFP, 64-Leads, Pitch 0,50mm"
  oval 1.2x0.3 smd: 1(-5.75,3.75) 2(-5.75,3.25) 3(-5.75,2.75) 4(-5.75,2.25) 5(-5.75,1.75) 6(-5.75,1.25) 7(-5.75,0.75) 8(-5.75,0.25) 9(-5.75,-0.25) 10(-5.75,-0.75) 11(-5.75,-1.25) 12(-5.75,-1.75) 13(-5.75,-2.25) 14(-5.75,-2.75) 15(-5.75,-3.25) 16(-5.75,-3.75) 33(5.75,-3.75) 34(5.75,-3.25) 35(5.75,-2.75) 36(5.75,-2.25) 37(5.75,-1.75) 38(5.75,-1.25) 39(5.75,-0.75) 40(5.75,-0.25) 41(5.75,0.25) 42(5.75,0.75) 43(5.75,1.25) 44(5.75,1.75) 45(5.75,2.25) 46(5.75,2.75) 47(5.75,3.25) 48(5.75,3.75)
  oval 0.3x1.2 smd: 17(-3.75,-5.75) 18(-3.25,-5.75) 19(-2.75,-5.75) 20(-2.25,-5.75) 21(-1.75,-5.75) 22(-1.25,-5.75) 23(-0.75,-5.75) 24(-0.25,-5.75) 25(0.25,-5.75) 26(0.75,-5.75) 27(1.25,-5.75) 28(1.75,-5.75) 29(2.25,-5.75) 30(2.75,-5.75) 31(3.25,-5.75) 32(3.75,-5.75) 49(3.75,5.75) 50(3.25,5.75) 51(2.75,5.75) 52(2.25,5.75) 53(1.75,5.75) 54(1.25,5.75) 55(0.75,5.75) 56(0.25,5.75) 57(-0.25,5.75) 58(-0.75,5.75) 59(-1.25,5.75) 60(-1.75,5.75) 61(-2.25,5.75) 62(-2.75,5.75) 63(-3.25,5.75) 64(-3.75,5.75)
  silkscreen extent -5.87,-4.5 4.5,4.57, body extent -6,-6 6,6, height 1.55
M2-3030-M [mm] "UNTESTED m.2 3030 type M"
  rect 0.35x1.5 smd: 1(9.25,-13.75) 3(8.75,-13.75) 5(8.25,-13.75) 7(7.75,-13.75) 9(7.25,-13.75) 11(6.75,-13.75) 13(6.25,-13.75) 15(5.75,-13.75) 17(5.25,-13.75) 19(4.75,-13.75) 21(4.25,-13.75) 23(3.75,-13.75) 25(3.25,-13.75) 27(2.75,-13.75) 29(2.25,-13.75) 31(1.75,-13.75) 33(1.25,-13.75) 35(0.75,-13.75) 37(0.25,-13.75) 39(-0.25,-13.75) 41(-0.75,-13.75) 43(-1.25,-13.75) 45(-1.75,-13.75) 47(-2.25,-13.75) 49(-2.75,-13.75) 51(-3.25,-13.75) 53(-3.75,-13.75) 55(-4.25,-13.75) 57(-4.75,-13.75) 67(-7.25,-13.75) 69(-7.75,-13.75) 71(-8.25,-13.75) 73(-8.75,-13.75) 75(-9.25,-13.75)
  rect 0.35x2 smd far side: 2(9,-13.5) 4(8.5,-13.5) 6(8,-13.5) 8(7.5,-13.5) 10(7,-13.5) 12(6.5,-13.5) 14(6,-13.5) 16(5.5,-13.5) 18(5,-13.5) 20(4.5,-13.5) 22(4,-13.5) 24(3.5,-13.5) 26(3,-13.5) 28(2.5,-13.5) 30(2,-13.5) 32(1.5,-13.5) 34(1,-13.5) 36(0.5,-13.5) 38(0,-13.5) 40(-0.5,-13.5) 42(-1,-13.5) 44(-1.5,-13.5) 46(-2,-13.5) 48(-2.5,-13.5) 50(-3,-13.5) 52(-3.5,-13.5) 54(-4,-13.5) 56(-4.5,-13.5) 58(-5,-13.5) 68(-7.5,-13.5) 70(-8,-13.5) 72(-8.5,-13.5) 74(-9,-13.5)
  round 5.5 / inner round 5.5 / far side round 6 hole 3.5: 76(0,15)
  Bottom region: -3,14 3,14 3,15 -3,15
QFN-32_EPAD_2.1X2.1 [mm]
  rrect50% 0.87x0.87 on Top Paste paste-5 mask+0.05: 0(-0.52,-0.5) 0(-0.52,0.52) 0(0.5,0.52) 0(0.5,-0.5)
  rrect50% 0.6x0.25 smd paste-0.009 mask+0.05: 1(-2.4,1.75) 2(-2.4,1.25) 3(-2.4,0.75) 4(-2.4,0.25) 5(-2.4,-0.25) 6(-2.4,-0.75) 7(-2.4,-1.25) 8(-2.4,-1.75) 17(2.4,-1.75) 18(2.4,-1.25) 19(2.4,-0.75) 20(2.4,-0.25) 21(2.4,0.25) 22(2.4,0.75) 23(2.4,1.25) 24(2.4,1.75)
  rrect50% 0.25x0.6 smd paste-0.009 mask+0.05: 9(-1.75,-2.4) 10(-1.25,-2.4) 11(-0.75,-2.4) 12(-0.25,-2.4) 13(0.25,-2.4) 14(0.75,-2.4) 15(1.25,-2.4) 16(1.75,-2.4) 25(1.75,2.4) 26(1.25,2.4) 27(0.75,2.4) 28(0.25,2.4) 29(-0.25,2.4) 30(-0.75,2.4) 31(-1.25,2.4) 32(-1.75,2.4)
  rrect10% 2.1x2.1 smd paste-5 mask+0.05: 33(0,0)
  silkscreen extent -2.87,-2.5 2.5,2.5, body extent -2.52,-2.51 2.5,2.51, height 0.82
R0402 [mm]
  rrect25% 0.5x0.6 smd paste-0.014 mask+0.05: 1(-0.5,0) 2(0.5,0)
  silkscreen extent 0,-0.15 0,0.15, body extent -0.5,-0.25 0.5,0.25, height 0.3
R0603 [mm]
  rrect25% 0.9x0.8 smd paste-0.022 mask+0.05: 1(-0.85,0) 2(0.85,0)
  silkscreen extent -0.2,-0.3 0.2,0.3, body extent -0.8,-0.4 0.8,0.4, height 0.4
R0805_ROUNDED [mm]
  rrect25% 0.9x1.2 smd paste-0.026 mask+0.075: 1(-1.05,0) 2(1.05,0)
  silkscreen extent -1.73,-0.83 1.73,0.83, body extent -1,-0.62 1,0.63, height 0.52
SOD123W [mm]
  rrect25% 1.2x1.2 smd paste-0.031 mask+0.05: 1(-1.4,0) 2(1.4,0)
  silkscreen extent -2,-0.95 2,0.95, body extent -2,-0.95 2,0.95, height 1.15
SOD-323_BI [mm]
  rrect25% 0.8x0.8 smd paste-0.021 mask+0.075: 1(0,1.3) 2(0,-1.3)
  silkscreen extent -0.7,-1 0.7,1, body extent -0.63,-1.24 0.65,1.24, height 1.01
SOP-8 [mm]
  rrect50% 0.5x1 smd paste-0.017 mask+0.075: 1(0,0) 2(1.27,0) 3(2.54,0) 4(3.81,0) 5(3.81,5.5) 6(2.54,5.5) 7(1.27,5.5) 8(0,5.5)
  silkscreen extent -0.52,0.85 4.38,4.65, body extent -0.53,-0.19 4.37,5.79, height 1.6
SOT-23(DBV5) [mm]
  rrect25% 0.6x1 smd paste-0.019 mask+0.075: 1(-0.95,-1.3) 2(0,-1.3) 3(0.95,-1.3) 4(0.95,1.3) 5(-0.95,1.3)
  silkscreen extent -1.55,-0.9 1.55,0.9, body extent -1.46,-1.17 1.46,1.17, height 1
SOT-23-6-USBLC-INTERNAL-JUMPERS [mm]
  rrect25% 1.05x0.6 smd paste-0.02 mask+0.075: 1(-1.35,0.95) 2(-1.35,0) 3(-1.35,-0.95) 4(1.35,-0.95) 5(1.35,0) 6(1.35,0.95)
  silkscreen extent -0.5,-1.45 0.5,1.45, body extent -1.4,-1.45 1.4,1.45, height 1.45
SOT-223 [mm]
  rrect25% 0.95x2.15 smd paste-0.034 mask+0.075: 1(-2.3,-3.1) 2(0,-3.1) 3(2.3,-3.1)
  rrect25% 3.25x2.15 smd paste-0.066 mask+0.075: 4(0,2.7)
  silkscreen extent -3.25,-1.6 3.25,1.73, body extent -3.35,-3.57 3.35,3.63, height 1.88
TEST_POINT_1.27_STEP#1 [mm]
  round 0.625 hole 0.6: 1(0,-0.17)
  Top region: 0,0.33 0,-0.67 -0.5,-0.67 -0.6,-0.57 -0.6,0.23 -0.5,0.33
  INNER_TOP region: 0,0.33 0,-0.67 -0.5,-0.67 -0.6,-0.57 -0.6,0.23 -0.5,0.33
  INNER_BOTTOM region: 0,0.33 0,-0.67 -0.5,-0.67 -0.6,-0.57 -0.6,0.23 -0.5,0.33
  POWER region: 0,0.33 0,-0.67 -0.5,-0.67 -0.6,-0.57 -0.6,0.23 -0.5,0.33
  GROUND region: 0,0.33 0,-0.67 -0.5,-0.67 -0.6,-0.57 -0.6,0.23 -0.5,0.33
  Bottom region: 0,0.33 0,-0.67 -0.5,-0.67 -0.6,-0.57 -0.6,0.23 -0.5,0.33
TEST_POINT_1.27_STEP#2 [mm]
  round 0.625 hole 0.6: 1(0,0)
  Top region: 0,-0.5 0,0.5 0.5,0.5 0.6,0.4 0.6,-0.4 0.5,-0.5
  INNER_TOP region: 0,-0.5 0,0.5 0.5,0.5 0.6,0.4 0.6,-0.4 0.5,-0.5
  INNER_BOTTOM region: 0,-0.5 0,0.5 0.5,0.5 0.6,0.4 0.6,-0.4 0.5,-0.5
  POWER region: 0,-0.5 0,0.5 0.5,0.5 0.6,0.4 0.6,-0.4 0.5,-0.5
  GROUND region: 0,-0.5 0,0.5 0.5,0.5 0.6,0.4 0.6,-0.4 0.5,-0.5
  Bottom region: 0,-0.5 0,0.5 0.5,0.5 0.6,0.4 0.6,-0.4 0.5,-0.5
TEST_POINT_1.27_STEP#3 [mm]
  round 0.625 hole 0.6: 1(0,-0.04)
  Top region: 0,-0.54 0,0.46 0.5,0.46 0.6,0.36 0.6,-0.44 0.5,-0.54
  INNER_TOP region: 0,-0.54 0,0.46 0.5,0.46 0.6,0.36 0.6,-0.44 0.5,-0.54
  INNER_BOTTOM region: 0,-0.54 0,0.46 0.5,0.46 0.6,0.36 0.6,-0.44 0.5,-0.54
  POWER region: 0,-0.54 0,0.46 0.5,0.46 0.6,0.36 0.6,-0.44 0.5,-0.54
  GROUND region: 0,-0.54 0,0.46 0.5,0.46 0.6,0.36 0.6,-0.44 0.5,-0.54
  Bottom region: 0,-0.54 0,0.46 0.5,0.46 0.6,0.36 0.6,-0.44 0.5,-0.54
TEST_POINT_1.27_STEP#4 [mm]
  round 0.625 hole 0.6: 1(0,-0.01)
  Top region: 0,-0.51 0,0.49 0.5,0.49 0.6,0.39 0.6,-0.41 0.5,-0.51
  INNER_TOP region: 0,-0.51 0,0.49 0.5,0.49 0.6,0.39 0.6,-0.41 0.5,-0.51
  INNER_BOTTOM region: 0,-0.51 0,0.49 0.5,0.49 0.6,0.39 0.6,-0.41 0.5,-0.51
  POWER region: 0,-0.51 0,0.49 0.5,0.49 0.6,0.39 0.6,-0.41 0.5,-0.51
  GROUND region: 0,-0.51 0,0.49 0.5,0.49 0.6,0.39 0.6,-0.41 0.5,-0.51
  Bottom region: 0,-0.51 0,0.49 0.5,0.49 0.6,0.39 0.6,-0.41 0.5,-0.51
TEST_POINT_1.27_STEP#5 [mm]
  round 0.625 hole 0.6: 1(0,0.12)
  Top region: 0,-0.38 0,0.62 0.5,0.62 0.6,0.52 0.6,-0.28 0.5,-0.38
  INNER_TOP region: 0,-0.38 0,0.62 0.5,0.62 0.6,0.52 0.6,-0.28 0.5,-0.38
  INNER_BOTTOM region: 0,-0.38 0,0.62 0.5,0.62 0.6,0.52 0.6,-0.28 0.5,-0.38
  POWER region: 0,-0.38 0,0.62 0.5,0.62 0.6,0.52 0.6,-0.28 0.5,-0.38
  GROUND region: 0,-0.38 0,0.62 0.5,0.62 0.6,0.52 0.6,-0.28 0.5,-0.38
  Bottom region: 0,-0.38 0,0.62 0.5,0.62 0.6,0.52 0.6,-0.28 0.5,-0.38
TEST_POINT_1.27_STEP#6 [mm]
  round 0.625 hole 0.6: 1(0,0.15)
  Top region: 0,-0.35 0,0.65 0.5,0.65 0.6,0.55 0.6,-0.25 0.5,-0.35
  INNER_TOP region: 0,-0.35 0,0.65 0.5,0.65 0.6,0.55 0.6,-0.25 0.5,-0.35
  INNER_BOTTOM region: 0,-0.35 0,0.65 0.5,0.65 0.6,0.55 0.6,-0.25 0.5,-0.35
  POWER region: 0,-0.35 0,0.65 0.5,0.65 0.6,0.55 0.6,-0.25 0.5,-0.35
  GROUND region: 0,-0.35 0,0.65 0.5,0.65 0.6,0.55 0.6,-0.25 0.5,-0.35
  Bottom region: 0,-0.35 0,0.65 0.5,0.65 0.6,0.55 0.6,-0.25 0.5,-0.35
TEST_POINT_1.27_STEP#7 [mm]
  round 0.625 hole 0.6: 1(0,0.08)
  Top region: 0,-0.42 0,0.58 0.5,0.58 0.6,0.48 0.6,-0.32 0.5,-0.42
  INNER_TOP region: 0,-0.42 0,0.58 0.5,0.58 0.6,0.48 0.6,-0.32 0.5,-0.42
  INNER_BOTTOM region: 0,-0.42 0,0.58 0.5,0.58 0.6,0.48 0.6,-0.32 0.5,-0.42
  POWER region: 0,-0.42 0,0.58 0.5,0.58 0.6,0.48 0.6,-0.32 0.5,-0.42
  GROUND region: 0,-0.42 0,0.58 0.5,0.58 0.6,0.48 0.6,-0.32 0.5,-0.42
  Bottom region: 0,-0.42 0,0.58 0.5,0.58 0.6,0.48 0.6,-0.32 0.5,-0.42
TEST_POINT_1.27_STEP#8 [mm]
  round 0.625 hole 0.6: 1(0,-0.09)
  Top region: 0,-0.59 0,0.41 0.5,0.41 0.6,0.31 0.6,-0.49 0.5,-0.59
  INNER_TOP region: 0,-0.59 0,0.41 0.5,0.41 0.6,0.31 0.6,-0.49 0.5,-0.59
  INNER_BOTTOM region: 0,-0.59 0,0.41 0.5,0.41 0.6,0.31 0.6,-0.49 0.5,-0.59
  POWER region: 0,-0.59 0,0.41 0.5,0.41 0.6,0.31 0.6,-0.49 0.5,-0.59
  GROUND region: 0,-0.59 0,0.41 0.5,0.41 0.6,0.31 0.6,-0.49 0.5,-0.59
  Bottom region: 0,-0.59 0,0.41 0.5,0.41 0.6,0.31 0.6,-0.49 0.5,-0.59
TEST_POINT_1.27_STEP#9 [mm]
  round 0.625 hole 0.6: 1(0,-0.06)
  Top region: 0,-0.56 0,0.44 0.5,0.44 0.6,0.34 0.6,-0.46 0.5,-0.56
  INNER_TOP region: 0,-0.56 0,0.44 0.5,0.44 0.6,0.34 0.6,-0.46 0.5,-0.56
  INNER_BOTTOM region: 0,-0.56 0,0.44 0.5,0.44 0.6,0.34 0.6,-0.46 0.5,-0.56
  POWER region: 0,-0.56 0,0.44 0.5,0.44 0.6,0.34 0.6,-0.46 0.5,-0.56
  GROUND region: 0,-0.56 0,0.44 0.5,0.44 0.6,0.34 0.6,-0.46 0.5,-0.56
  Bottom region: 0,-0.56 0,0.44 0.5,0.44 0.6,0.34 0.6,-0.46 0.5,-0.56
TEST_POINT_SMD [mm]
  rrect50% 0.5x1 smd paste-0.5 mask+0: 1(0,0)
  silkscreen extent -0.35,-0.6 0.35,0.6

## Part data
BQ1: library part YSX321SL_1, "Резонатор кварцевый X32258MOB4SI 8 MHz", Manufacturer=YXC, Manufacturer Part Number=X32258MOB4SI, Component Type="Резонатор кварцевый"
BQ2: library part YSX321SL, "Резонатор кварцевый X322525MOB4SI 25 MHz", Manufacturer=YXC, Manufacturer Part Number=X322525MOB4SI, Component Type="Резонатор кварцевый"
C1 C4 C5 C9 C11 C12 C26 C29 C34 C35 C36: library part C0603, "Чип-конденсатор 4,7 мкФ 10% 16 В X5R 0603", Manufacturer=Yageo, Manufacturer Part Number=CC0603KRX5R7BB475, Component Type=Конденсатор, TYPE="Чип-конденсатор 0603"
C2 C3 C6 C7 C8 C13 C14 C16 C17 C18 C19 C20 C27 C32 C33 C37 C38: library part C0402, "Чип-конденсатор 100 нФ 10% 50 В X7R 0402", Manufacturer=Yageo, Manufacturer Part Number=CC0402KRX7R9BB104, Component Type=Конденсатор
C10 C15: library part C0603_6, "Чип-конденсатор 12 пФ 5% 50 В C0G(NP0) 0603", Manufacturer=Yageo, Manufacturer Part Number=CC0603JRNPO9BN120, Component Type=Конденсатор, TYPE="Чип-конденсатор 0603"
C21 C28 C30 C31: library part C0402, "Чип-конденсатор 10 нФ 10% 50 В X7R 0402", Manufacturer=Yageo, Manufacturer Part Number=CC0402KRX7R9BB103, Component Type=Конденсатор
C22 C23: library part C0603, "Чип-конденсатор 12 пФ 5% 50 В C0G(NP0) 0603", Manufacturer=Yageo, Manufacturer Part Number=CC0603JRNPO9BN120, Component Type=Конденсатор, TYPE="Чип-конденсатор 0603"
C24 C25: library part C0805_2, "Чип-конденсатор 0,22 мкФ ±10% 100 В X7R 0805", Manufacturer=Yageo, Manufacturer Part Number=CC0805KKX7R0BB224, Component Type=Конденсатор, TYPE="Чип-конденсатор 0805"
DA1: "LDO-регулятор SOT-223", Manufacturer=UMW, Component Type=Микросхема, Manufacturer Part Number=LM317G
DA2: "LDO-регулятор SOT-23-5", Manufacturer=3PEAK, Component Type=Микросхема, Manufacturer Part Number=TPL730ADJ-5TR
DD1: "Микроконтроллер ARM", Manufacturer="ST Microelectronics", Component Type=Микроконтроллер, Manufacturer Part Number=STM32F107RCT6
DD2: "Микросхема приёмопередатчика 10Base-T1L", Manufacturer="Texas Instruments", Manufacturer Part Number=DP83TD510ERHB, Component Type=Микросхема
DD3: "Трансивер RS-485 SP3485EEN", Manufacturer=UMW, Component Type=Микросхема, Manufacturer Part Number=SP3485EEN
HL1 HL2: "Светодиод SMD 0402 прямой синий FYLS-0402UBC", Manufacturer=Foryard, Component Type=Светодиод, Manufacturer Part Number=FYLS-0402UBC, Part Number=FYLS-0402UBC
HL3 HL4: "Светодиод SMD 0402 прямой зелёный FYLS-0402UGC", Manufacturer=Foryard, Component Type=Светодиод, Manufacturer Part Number=FYLS-0402UGC
HL5: library part FYLS-0402CKUAC, "Светодиод SMD 0402 прямой оранжевый 0402", Manufacturer=Foryard, Component Type=Светодиод, Manufacturer Part Number=FYLS-0402CKUAC
L1: "Фильтр синфазный DLW21SN900SQ2L", Manufacturer=Murata, Component Type="Фильтр синфазный", Manufacturer Part Number=DLW21SN900SQ2L
L2 L3 L4 L5 L6 L7: library part BLM18PG121SN1D, "Фильтр индуктивный 120 Ом @ 100 МГц 2 А 0603", Manufacturer="FENGHUA Advanced Technology", Manufacturer Part Number=CBM160808U121T, Component Type="Фильтр индуктивный"
R1 R2: library part R0402_1, "Чип-резистор 10 кОм 1% 0402", Manufacturer=Yageo, Manufacturer Part Number=RC0402FR-0710KL, Component Type=Резистор
R3: library part R0603_3, "Чип-резистор 16,5 кОм 1% 0603", Manufacturer=Yageo, Manufacturer Part Number=RC0603FR-0716K5L, Component Type=Резистор, TYPE="Чип-резистор 0603"
R4: library part R0603_23, "Чип-резистор 15 кОм 1% 0603", Manufacturer=Yageo, Manufacturer Part Number=RC0603FR-0715KL, Component Type=Резистор, TYPE="Чип-резистор 0603"
R5 R6 R7 R8 R9 R71 R72 R74 R75 R79 R80: library part R0402_4, "Чип-резистор 1 кОм 1% 0402", Manufacturer=Yageo, Manufacturer Part Number=RC0402FR-071KL, Component Type=Резистор
R10 R12 R23 R26 R65 R69: library part R0402, "Чип-резистор 0 ом 1% 0402", Manufacturer=Yageo, Manufacturer Part Number=RC0402FR-070RL, Component Type=Резистор
R11 R15 R16 R17 R18 R22 R27 R28 R29 R37 R38 R78: library part R0402, "Чип-резистор 4,7 кОм 1% 0402", Manufacturer=Yageo, Manufacturer Part Number=RC0402FR-074K7L, Component Type=Резистор
R13 R14 R19 R20 R21 R24 R25 R30 R31 R32 R33 R34 R35 R36 R39 R40 R41 R42 R43 R44 R54 R55 R56 R57 R58 R59 R60: library part R0402_tooth_1, "Чип-резистор 22 Ом 1% 0402", Manufacturer=Yageo, Manufacturer Part Number=RC0402FR-0722RL, Component Type=Резистор
R45 R46 R47 R48 R50 R51 R52 R53 R76 R77: library part R0402_tooth_4, "Чип-резистор 2,49 кОм 1% 0402", Manufacturer=Yageo, Manufacturer Part Number=RC0402FR-072K49L, Component Type=Резистор
R49 R61 R66: library part R0402, "Чип-резистор 10 кОм 1% 0402", Manufacturer=Yageo, Manufacturer Part Number=RC0402FR-0710KL, Component Type=Резистор
R62 R67 R68: library part R0402, "Чип-резистор 2,49 кОм 1% 0402", Manufacturer=Yageo, Manufacturer Part Number=RC0402FR-072K49L, Component Type=Резистор
R63 R64: library part R0603_13, "Чип-резистор 1 МОм 1% 0603", Manufacturer=Yageo, Manufacturer Part Number=RC0603FR-071ML, Component Type=Резистор, TYPE="Чип-резистор 0603"
R70 R73: library part R0603, "Чип-резистор 39 Ом 1% 0603", Manufacturer=Yageo, Manufacturer Part Number=RC0603FR-0739RL, Component Type=Резистор, TYPE="Чип-резистор 0603"
R81: library part R0805, "Чип-резистор 120 Ом 1% 0805", Manufacturer=Yageo, Manufacturer Part Number=RC0805FR-07120RL, Component Type=Резистор, TYPE="Чип-резистор 0805"
TP1 TP2 TP3 TP4 TP5 TP6 TP7 TP8 TP9 TP10 TP11 TP12 TP13 TP14 TP15 TP16 TP17 TP18 TP19 TP20 TP21 TP22 TP23 TP24 TP25 TP26 TP27 TP28 TP29 TP30 TP31 TP32 TP33 TP34 TP35: "Контрольная точка SMD"
VD1: "Диод Шоттки SOD123W", Manufacturer=Nexperia, Component Type=Диод, Manufacturer Part Number=PMEG10020ELRX
VD2 VD3 VD4 VD7: "Диодная сборка ESD защиты USBLC6-2SC6", Manufacturer=UMW, Component Type="Сборка диодная", Manufacturer Part Number=USBLC6-2SC6
VD5 VD6: "TVS-диод симметричный +3V3", Manufacturer="TECH PUBLIC Co.", Component Type="Сборка диодная", Manufacturer Part Number=SP4020-01FTG-C
ZQ1: "Резонатор кварцевый 8.0 МГц", Manufacturer=Abracon, Component Type="Кварцевый генератор", Manufacturer Part Number=ASE-8.000MHZ-LC-T

## Free pads (board coordinates)
  round 1 hole 0.6: 76(-15,-25.3) 76(-15,-24.03) 76(-15,-22.76) 76(-15,-21.49) 76(-15,-20.22) 76(-15,-18.95) 76(-15,-17.68) 76(-15,-16.41) 76(-15,-15.14) 76(-15,-13.87) 76(-15,-12.6) 76(-15,-11.33) 76(15,-21.49) 76(15,-20.22) 76(15,-17.68) 76(15,-16.41) 76(15,-15.14) 76(15,-3.71) 76(15,-4.98) 76(15,-2.44) 76(15,-18.95) 76(15,-13.87) 76(15,-12.6) 76(15,-11.33) 76(15,-10.06) 76(15,-8.79) 76(15,-7.52) 76(15,-6.25) 76(15,-25.3) 76(15,-22.76) 76(15,-24.03)
  round 1 all layers, no hole paste-2539.97 mask+0.5: Репер(-54.7,16.3)

## Via types
v1: diameter 0.4, hole 0.2, Top to Bottom, tented both sides, 121 vias
v2: diameter 0/0/0/0/0/6 (per signal layer), hole 0, Top to Bottom, 1 vias